# Altium PCB PCB.PcbDoc
Units mm, origin at the board's own origin, x right, y up, seen from the top; angles counter-clockwise.
Board outline 74.55 x 49.28 mm, 2 copper layers (Top Layer, Bottom Layer); 21 components, 19 nets, 63 pads, 0 vias.
Unrouted connection lines stored in the file: 2.
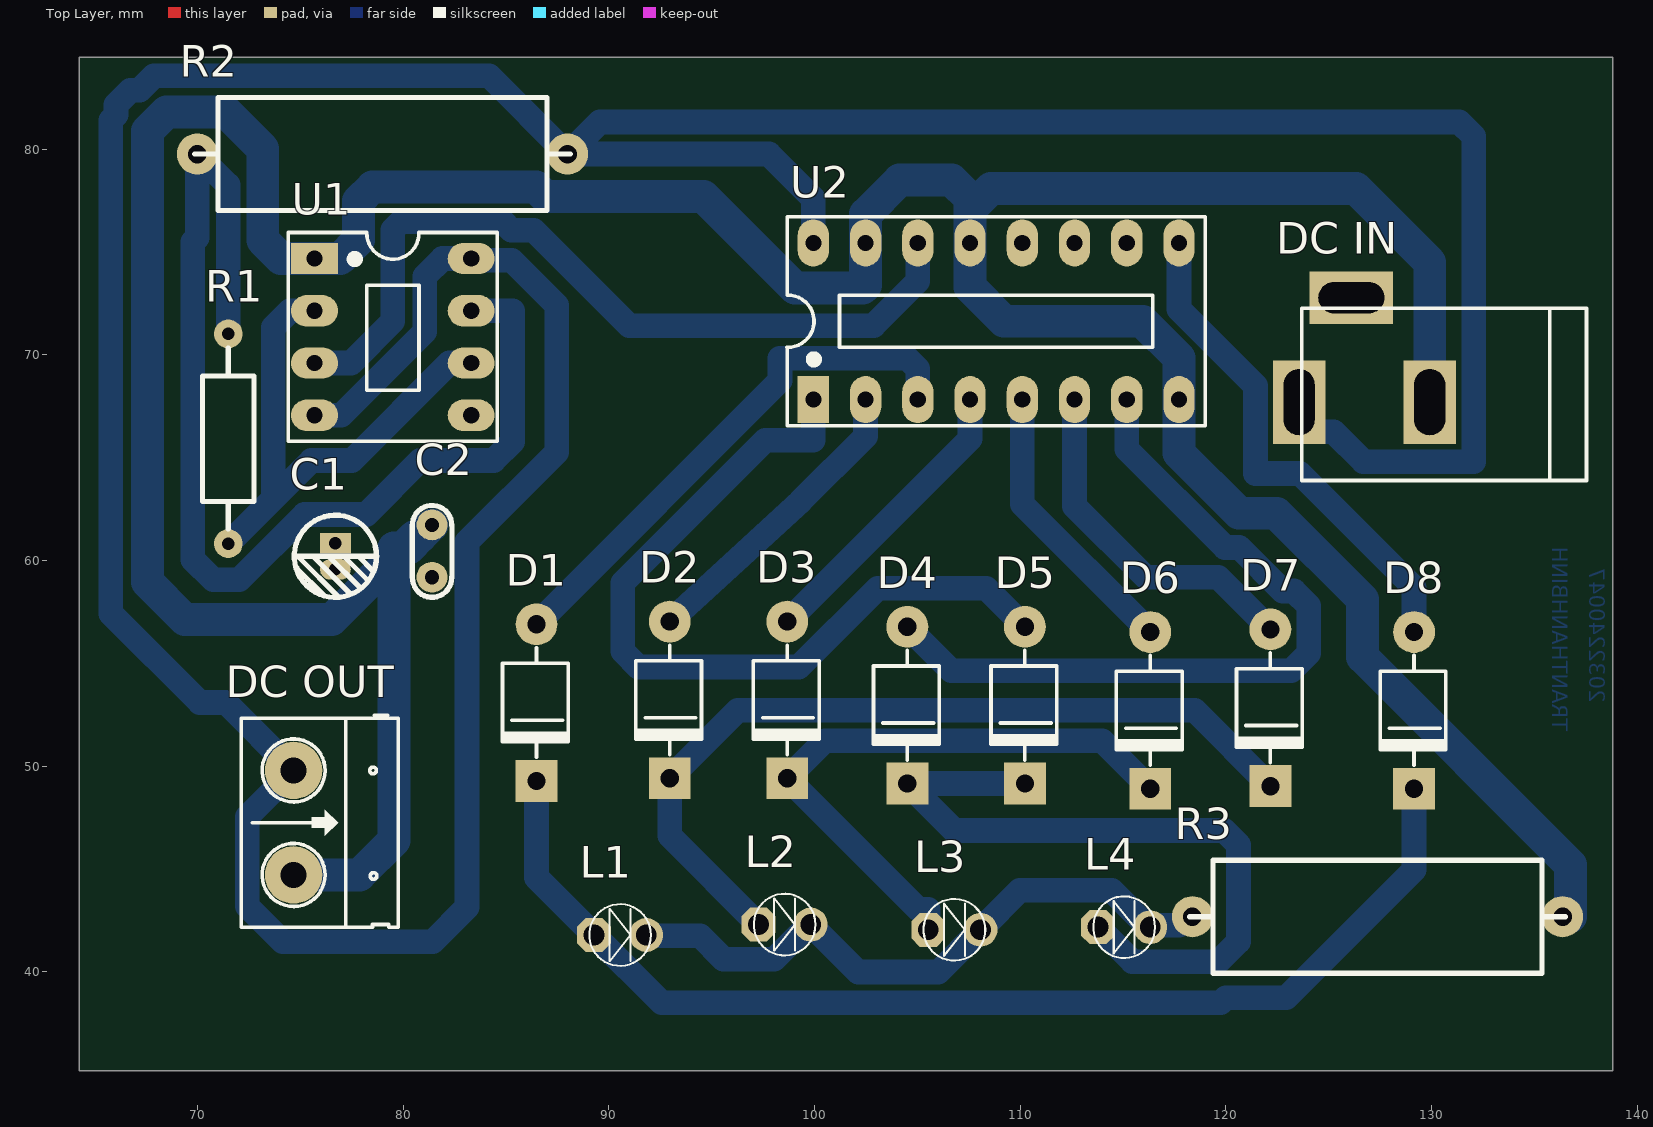
[diagram p0: Top Layer view]
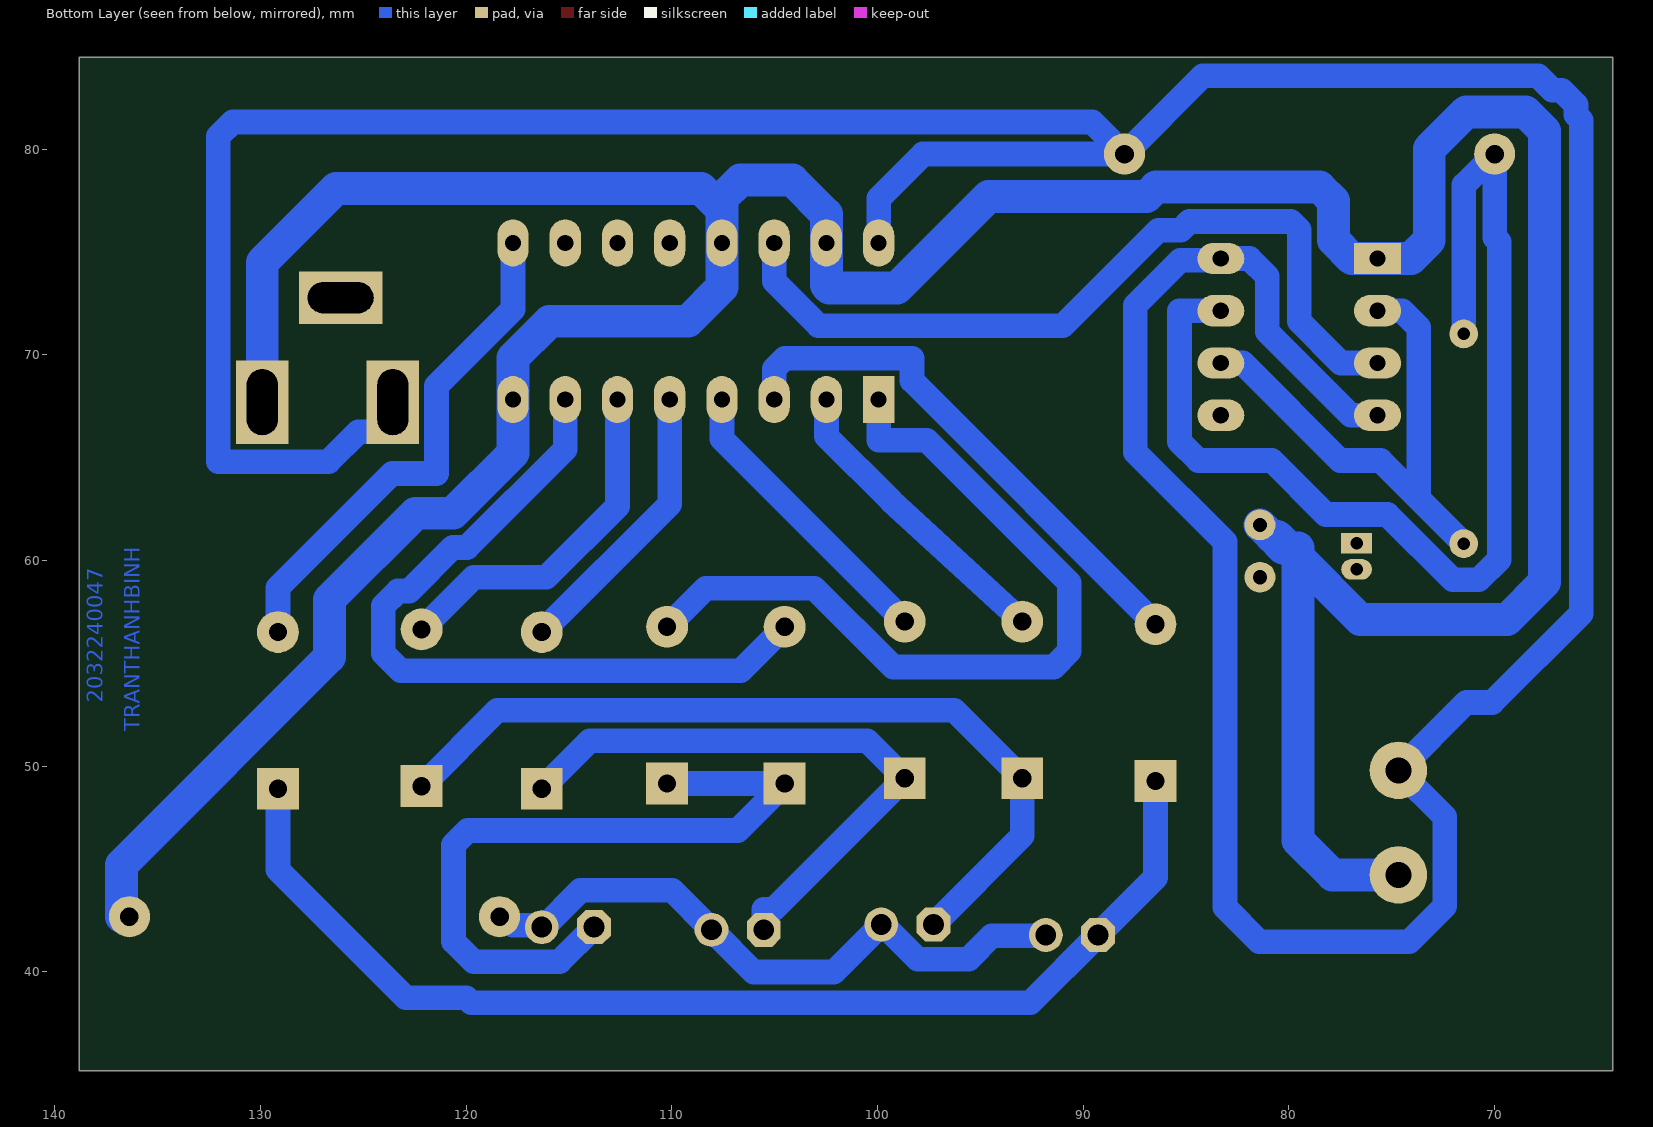
[diagram p1: Bottom Layer view, seen from below]
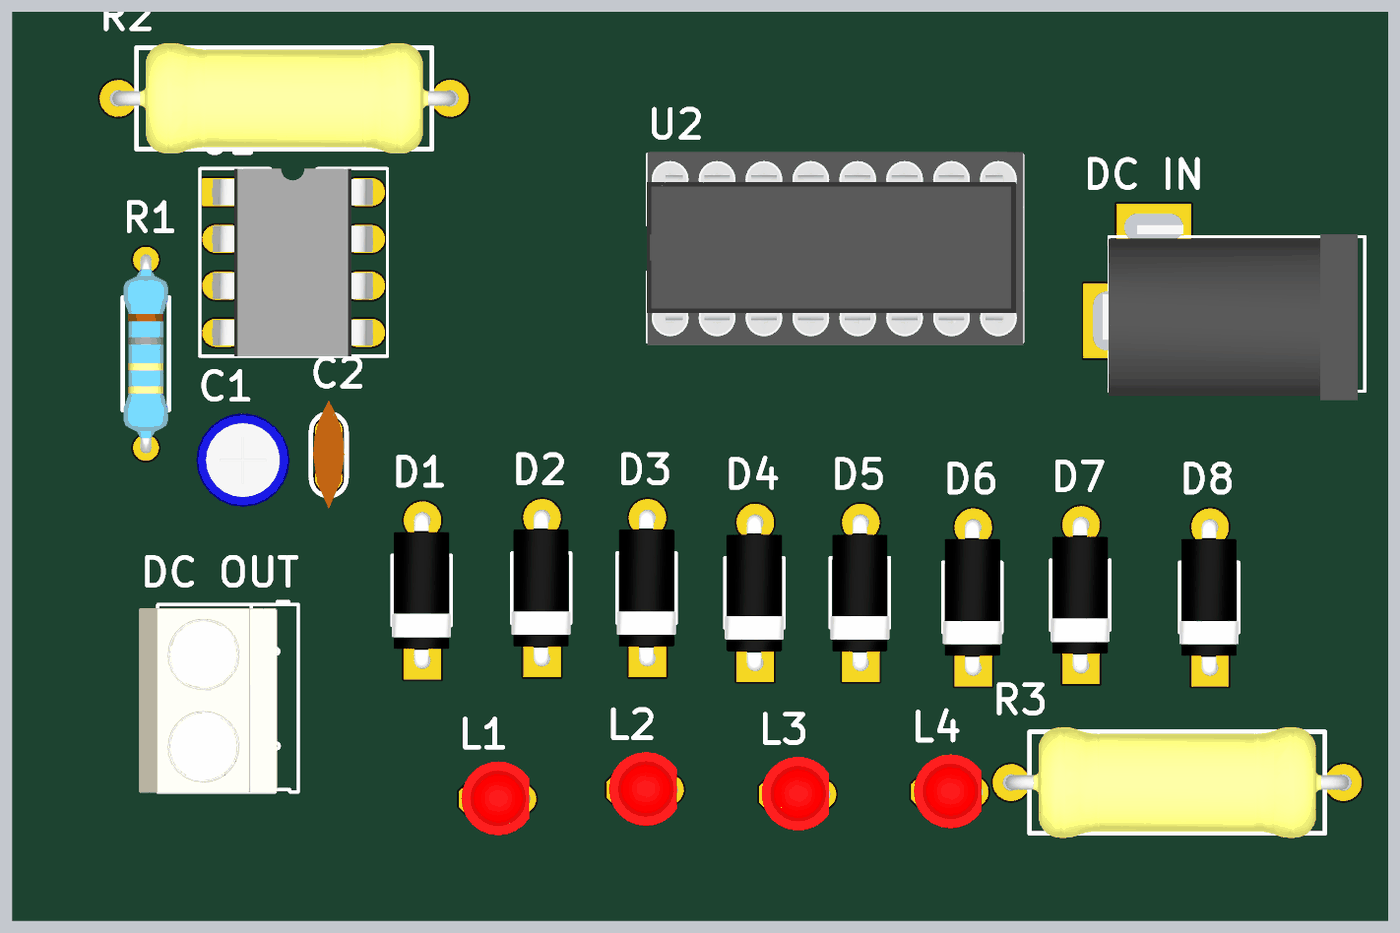
[diagram p2: 3D render of the assembled board from above, using the file's embedded part models]

## Layer stack, top to bottom
Top Solder: solder mask 0.0102, Solder Resist, Dk 3.5
Top Layer: signal copper 0.0356
Dielectric 1: dielectric 0.32, FR-4, Dk 4.8
Bottom Layer: signal copper 0.0356
Bottom Solder: solder mask 0.0102, Solder Resist, Dk 3.5

## Board outline
64.262,35.179 138.811,35.179 138.811,84.455 64.262,84.455

## Design rules (kind name [scope] priority, off if disabled: settings)
Clearance [All] p1: gap=0.254 ignorepadtopadclearanceinfootprint=FALSE except(0: Arc-Hole Track-Hole SMDPad-Hole THPad-Hole Via-Hole Fill-Hole Poly-Hole Region-Hole Text-Hole)
PolygonConnect [All] p1: connectstyle=Relief reliefconductorwidth=0.254 reliefentries=4 polygonreliefangle="90 Angle" airgapwidth=0.254
RoutingLayers [All] p1: top layer_v5=FALSE bottom layer_v5=TRUE
RoutingVias [All] p1: holewidth=0.711 width=1.27 viastyle="Through Hole" minholewidth=0.711 minwidth=1.27 maxholewidth=0.711 maxwidth=1.27
SolderMaskExpansion [All] p1: expansion=0.102 istentingtop=FALSE
Width Width_GND [InNet('GND')] p1: maxlimit=1.6 minlimit=1.6 preferedwidth=1.6
Width [All] p2: maxlimit=1.2 minlimit=1.2 preferedwidth=1.2
29 further rules are at their usual default settings.

## Components (designator, comment, footprint, x,y, rotation, side; value= is the part's Value field where it differs from the comment)
C1 "10uF" "tu hoa 4mm" 76.708,60.198 r270 top
C2 "104" "tu gom" 81.407,60.452 r90 top
D1 "" "DIODE 1A" 86.487,58.166 r90 top
D2 "" "DIODE 1A" 92.964,58.293 r90 top
D3 "" "DIODE 1A" 98.679,58.293 r90 top
D4 "" "DIODE 1A" 104.521,58.039 r90 top
D5 "" "DIODE 1A" 110.236,58.039 r90 top
D6 "" "DIODE 1A" 116.332,57.785 r90 top
D7 "" "DIODE 1A" 122.174,57.912 r90 top
D8 "" "DIODE 1A" 129.159,57.785 r90 top
"DC IN" "JACK DC 5.5" "JACK DC 5.5" 126.746,70.231 r180 top value="Jac DC"
"DC OUT" "Header 2" HED2 74.676,49.784 r270 top
L1 "" LED-3MM-RED 89.281,41.783 r0 top
L2 "" LED-3MM-RED 97.282,42.291 r0 top
L3 "" LED-3MM-RED 105.537,42.037 r0 top
L4 "" LED-3MM-RED 113.792,42.164 r0 top
R1 "68k" "tro vach 1/4w" 71.501,65.913 r90 top
R2 "10k" "tro vach 1w" 78.994,79.756 r0 top
R3 "1k" "tro vach 1w" 127.381,42.672 r180 top
U1 "LM555" DIP8/W0.3 75.692,74.676 r270 top
U2 "4017" DIP16/W0.3 99.949,67.818 r0 top value=CD4017

## Footprints (in the part's own frame and the unit in brackets; to place one, negate y for a bottom-side part, rotate by r counter-clockwise, add the part's x,y. Pads: shape width x height; smd on the part's side, far side on the other; paste and mask are expansions set on the pad)
"DIODE 1A" [mil] "Diode 1A"
  round 80 hole 35: 1(-50,0)
  rect 80x80 hole 35: 2(-350,0)
  silkscreen extent -305,-61 -95,65, body extent -366,-61 -34,65, height 122
DIP8/W0.3 [mil] "8 PIN, W 300mil, Pin to pin 100mil"
  rect 60x90 hole 31: 1(0,0)
  oval 60x90 hole 31: 2(100,0) 3(200,0) 4(300,0) 5(300,300) 6(200,300) 7(100,300) 8(0,300)
  silkscreen extent -50,-50 350,350, body extent -50,-40 350,336, height 201
DIP16/W0.3 [mil] "16 PIN, W 300mil, Pin to pin 100mil"
  rect 60x90 hole 31: 1(0,0)
  oval 60x90 hole 31: 2(100,0) 3(200,0) 4(300,0) 5(400,0) 6(500,0) 7(600,0) 8(700,0) 9(700,300) 10(600,300) 11(500,300) 12(400,300) 13(300,300) 14(200,300) 15(100,300) 16(0,300)
  silkscreen extent -50,-50 750,350, body extent -52,-57 752,356, height 299
HED2 [mil] "Header 2, 2 pin, hight 300mil, Pin to Pin 200, Colour Green"
  round 110 hole 50: 1(0,0) 2(200,0)
  silkscreen extent -106,-100 300,200, body extent -92,-140 302,155, height 394
"JACK DC 5.5" [mm] "Jac DC input"
  rect 2.54x4.064 hole 1.5 slot 3.2 at 90 deg: 1(3.175,2.54) 2(-3.175,2.54)
  rect 4.064x2.54 hole 1.5 slot 3.2 at 0 deg: 3(0.635,-2.54)
  silkscreen extent -10.8,-2.03 3.05,6.35, body extent -10.42,-2.67 3.4,6.84, height 11.02
LED-3MM-RED [mil]
  oct 65x65 hole 40: 1(0,0)
  round 65 hole 40: 2(100,0)
  silkscreen extent -9,-59 109,59, body extent -27,-77 117,80, height 181
"tro vach 1/4w" [mm]
  round 1.4 hole 0.6: 1(-5.1,0) 2(5.1,0)
  silkscreen extent -4.39,-1.25 4.42,1.25, body extent -5.38,-1.2 5.38,1.2, height 2.41
"tro vach 1w" [mm]
  round 2 hole 0.9: 1(-9,0) 2(9,0)
  silkscreen extent -9.14,-2.75 9.14,2.75, body extent -9.29,-3 9.29,3, height 6.5
"tu gom" [mm] "Tu gom mini"
  round 1.5 hole 0.7: 1(-1.27,0) 2(1.27,0)
  silkscreen extent -2.25,-0.97 2.22,0.97, body extent -2.92,-0.85 2.92,0.85, height 6.12
"tu hoa 4mm" [mm]
  rect 1x1.5 hole 0.6: 1(-0.635,0)
  oval 1x1.5 hole 0.6: 2(0.635,0)
  silkscreen extent -2,-2 2.01,2.01, body extent -2.47,-2.47 2.58,2.58, height 14.81

## Part data
C1: library part "Tu Hoa 10uF 16V 4x7", "Cắm", Chung_Loai=Cắm, Don_Vi=Con, Ma_Hang=MH006855, So_Chan=2, Ten_Linh_Kien="Tụ Hóa 10uF 16V"
C2: library part "Tu gom 104 50V", "Cắm", Chung_Loai=Cắm, Don_Vi=Con, Ma_Hang=MH004761, So_Chan=2, Ten_Linh_Kien="Tụ gốm 104 100nF 50V"
D1 D2 D3 D4 D5 D6 D7 D8: library part "Diode 1N4007", "Cắm", Chung_Loai=Cắm, Don_Vi=Con, Ma_Hang=MH001063, Ten_Linh_Kien="Diode 1N4007 1A (DIP)"
"DC OUT": library part Hed2, "Header 2 (Green)"
L1 L2 L3 L4: library part "LED 3mm Do", "Cắm", Chung_Loai=Cắm, Don_Vi=Con, Ma_Hang=MH003892, Ten_Linh_Kien="Led 3MM Phủ Đỏ (10c)"
R1: library part "Tro Vach 1/4W 5% 68k", "Cắm", Chung_Loai=Cắm, Don_Vi=Con, Ma_Hang=MH007332, So_Chan=2, Ten_Linh_Kien="Trở Vạch 1/4w 5% 68k"
R2: library part "Tro Vach 1W 5% 10k", "Cắm", Chung_Loai=Cắm, Don_Vi=Con, Ma_Hang=MH006391, So_Chan=2, Ten_Linh_Kien="Trở 5% 1w 10k"
R3: library part "Tro Vach 1W 5% 1k", "Cắm", Chung_Loai=Cắm, Don_Vi=Con, Ma_Hang=MH006397, So_Chan=2, Ten_Linh_Kien="Trở 5% 1w 1k"
U1: "Timer"
U2: "Decade Counter/Divider with 10 Decoded Outputs", Designed by=VanDungEvn

## Nets (pads, with @x,y where several pads share a name; then routed paths per layer and width w, separated by ;. In a path a pad name is that pad's centre, name@x,y a point inside that pad or via, vN(x,y) a via of type N, cw(c..) or ccw(c..) an arc to the next point about the centre after c; other vN are vias at no path point)
GND: "DC IN.2" "DC OUT.2" C1.2 C2.2 R3.1 U1.1 U2.8 U2.13 U2.15 | length 197.9
  Bottom Layer w1.6: 74.676,44.704 77.881,44.704 79.553,46.375 79.553,60.147 ; C2.2 80.848,61.163 ; 129.921,67.691 129.921,74.498 126.34,78.08 108.585,78.08 107.569,77.064 ; R3.1@136.762,42.672 136.762,45.197 126.657,55.302 126.657,58.096 122.464,62.289 120.655,62.289 117.729,65.215 U2.8 117.729,69.85 115.951,71.628 109.22,71.628 107.569,73.279 U2.13 107.569,77.064 ; 79.553,60.147 80.01,60.604 ; 79.553,60.147 76.53,57.125 69.39,57.125 67.564,58.95 67.564,80.873 68.501,81.81 71.377,81.81 73.177,80.01 73.177,75.565 74.066,74.676 U1.1 76.937,74.676 77.826,75.565 77.826,77.47 78.511,78.156 86.462,78.156 86.919,77.699 94.602,77.699 99.06,73.241 102.349,73.241 102.489,73.381 U2.15 102.489,76.835 104.14,78.486 106.68,78.486 107.569,77.597 107.569,77.064 ; 79.553,60.147 79.553,60.604 80.01,60.604 ; 80.01,60.604 80.569,61.163 80.848,61.163 ; 80.01,60.604 80.289,60.604 80.848,61.163
NetC1_1: C1.1 C2.1 R1.1 U1.2 U1.5 U1.6 | length 26.1
  Bottom Layer w1.2: R1.1 73.685,62.997 ; U1.2 74.498,72.136 73.685,71.323 73.685,62.997 ; U1.6 82.239,69.596 77.495,64.852 75.54,64.852 73.685,62.997
NetC2_1: 
NetD1_1: D1.1 U2.3 | length 26.2
  Bottom Layer w1.2: D1.1 98.323,68.732 98.323,69.825 104.521,69.825 105.029,69.317 U2.3
NetD1_2: D1.2 D8.2 L1.1 | length 56.5
  Bottom Layer w1.2: D1.2 86.487,44.577 L1.1 92.583,38.481 119.761,38.481 120.015,38.735 122.942,38.735 129.159,44.952 D8.2
NetD2_1: D2.1 U2.2 | length 14.9
  Bottom Layer w1.2: D2.1 99.339,62.89 102.489,66.04 U2.2
NetD2_2: D2.2 D7.2 L2.1 | length 41
  Bottom Layer w1.2: L2.1 92.964,46.609 D2.2 96.266,52.705 118.491,52.705 D7.2
NetD3_1: D3.1 U2.4 | length 14.5
  Bottom Layer w1.2: D3.1 107.569,65.913 U2.4
NetD3_2: D3.2 D6.2 L3.1 | length 29.9
  Bottom Layer w1.2: L3.1 105.537,43.028 105.054,43.028 D3.2 100.508,51.232 113.995,51.232 D6.2
NetD4_1: D4.1 U2.7 | length 37.5
  Bottom Layer w1.2: D4.1 106.655,54.635 123.19,54.635 124.044,55.489 124.044,57.785 123.317,58.512 122.768,58.512 120.65,60.63 119.966,60.63 115.189,65.407 U2.7
NetD4_2: D4.2 D5.2 L4.1 | length 35.7
  Bottom Layer w1.2: D5.2 D4.2 106.807,46.863 119.922,46.863 120.625,46.16 120.625,41.47 119.639,40.484 115.472,40.484 L4.1
NetD5_1: D5.1 U2.1 | length 39.7
  Bottom Layer w1.2: U2.1 99.949,65.837 97.612,65.837 90.678,58.903 90.678,55.575 91.44,54.813 99.238,54.813 103.073,58.649 108.356,58.649 D5.1
NetD6_1: D6.1 U2.5 | length 13.9
  Bottom Layer w1.2: U2.5 110.109,62.738 D6.1
NetD7_1: D7.1 U2.6 | length 17.2
  Bottom Layer w1.2: U2.6 112.649,62.638 116.106,59.181 119.635,59.181 D7.1
NetD8_1: D8.1 U2.9 | length 24.9
  Bottom Layer w1.2: U2.9 117.729,72.212 121.447,68.494 121.447,64.227 123.6,64.227 129.159,58.668 D8.1
NetL1_2: L1.2 L2.2 L3.2 L4.2 R3.2 | length 31.3
  Bottom Layer w1.2: L1.2 91.857,41.747 94.446,41.747 95.582,40.611 98.048,40.611 99.728,42.291 L2.2 102.133,39.98 106.02,39.98 L3.2 109.995,43.955 114.447,43.955 116.238,42.164 L4.2 116.418,42.25 117.743,42.25 118.165,42.672 R3.2
NetR1_2: R1.2 R2.1 U1.7 | length 56.3
  Bottom Layer w1.2: R1.2 71.501,78.249 R2.1 69.994,75.698 69.777,75.481 69.777,60.043 70.764,59.055 72.034,59.055 75.209,62.23 78.207,62.23 80.837,64.86 84.407,64.86 85.319,65.772 85.319,72.136 U1.7
NetU1_3: U1.3 U2.14 | length 39.6
  Bottom Layer w1.2: U1.3 77.47,69.596 79.502,71.628 79.502,76.073 79.908,76.479 84.833,76.479 85.268,76.045 86.36,76.045 90.989,71.415 102.87,71.415 105.029,73.574 U2.14
VCC: "DC IN.1" "DC OUT.1" R2.2 U1.4 U1.8 U2.16 | length 215.6
  Bottom Layer w1.2: U1.4 76.987,67.056 81.051,71.12 81.051,73.812 81.915,74.676 U1.8 83.693,74.676 83.693,74.591 85.277,74.591 87.465,72.402 87.465,65.266 83.106,60.906 83.106,43.126 81.432,41.453 74.143,41.453 72.415,43.18 72.415,47.523 74.676,49.784 71.367,53.093 70.111,53.093 65.786,57.417 65.786,81.407 66.04,81.661 66.04,82.16 66.743,82.863 67.183,82.863 67.886,83.566 84.184,83.566 R2.2 ; U2.16 99.949,77.597 97.79,79.756 R2.2 ; 123.571,67.691 123.571,66.259 125.24,66.259 126.704,64.795 132.055,64.795 132.055,80.614 131.352,81.317 89.555,81.317 R2.2
pads on no net: "DC IN.3" U2.10 U2.11 U2.12

## Other copper
Bottom Layer:
  text "2032240047" at 137.668,53.086 h0.75 r270
  text "TRANTHANHBINH" at 135.89,51.689 h0.75 r270